# Altium PCB Power.PcbDoc
Units mil, origin at the board's own origin, x right, y up, seen from the top; angles counter-clockwise.
Board outline 6000 x 4000 mil, 2 copper layers (Top Layer, Bottom Layer); 17 components, 17 nets, 78 pads, 0 vias.
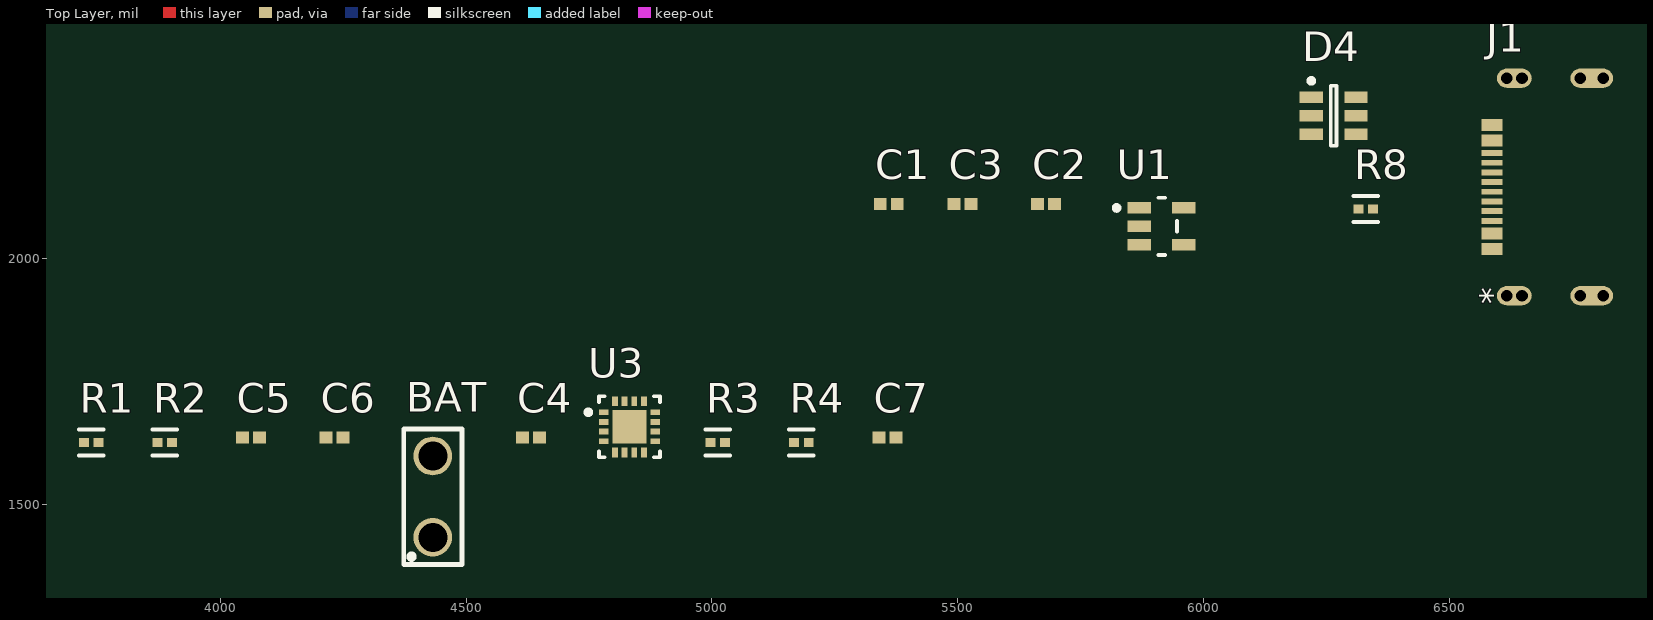
[diagram p0: Top Layer view]
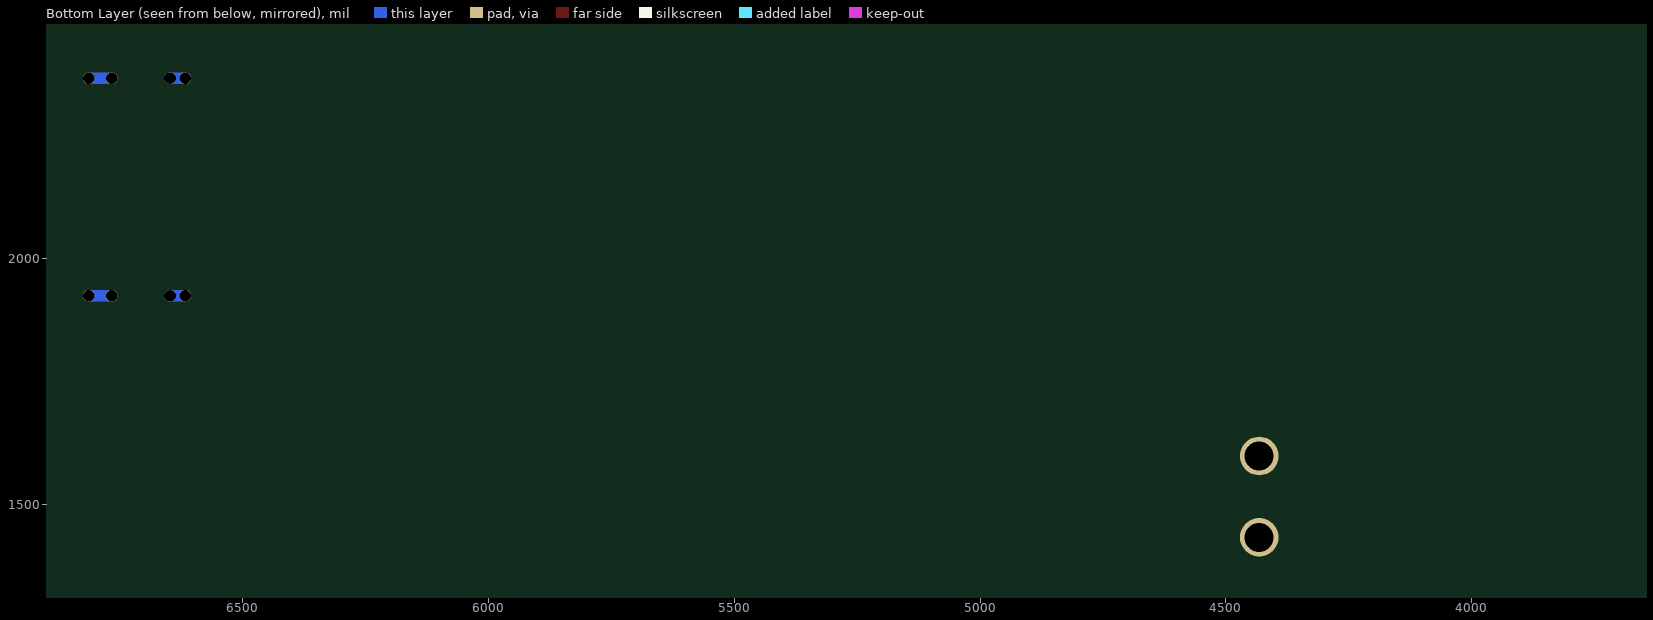
[diagram p1: Bottom Layer view, seen from below]

## Layer stack, top to bottom
Top Solder: solder mask 0.4, Solder Resist, Dk 3.5
Top Layer: signal copper 1.4
Dielectric 1: dielectric 12.6, FR-4, Dk 4.8
Bottom Layer: signal copper 1.4
Bottom Solder: solder mask 0.4, Solder Resist, Dk 3.5

## Board outline
1000,1000 7000,1000 7000,5000 1000,5000

## Design rules (kind name [scope] priority, off if disabled: settings)
Clearance [All] p1: gap=10 ignorepadtopadclearanceinfootprint=FALSE except(0: Arc-Hole Track-Hole SMDPad-Hole THPad-Hole Via-Hole Fill-Hole Poly-Hole Region-Hole Text-Hole)
PolygonConnect [All] p1: connectstyle=Relief reliefconductorwidth=10 reliefentries=4 polygonreliefangle="90 Angle" airgapwidth=10
RoomDefinition U_USB [InComponentClass('U_USB')] p1: confinementstyle=ConfineIn formatcopy=TRUE lockcomponents=FALSE outline 6135,1910 6825,1910 6825,2510 6135,2510
RoomDefinition U_L6924D013TR [InComponentClass('U_L6924D013TR')] p2: confinementstyle=ConfineIn formatcopy=TRUE lockcomponents=FALSE outline 3684.68,1355 5434.69,1355 5434.69,1755 3684.68,1755
RoomDefinition Power [InComponentClass('Power')] p3: confinementstyle=ConfineIn formatcopy=TRUE lockcomponents=FALSE outline 5975,995 7000,995 7000,1450 5975,1450
RoomDefinition U_LD3985M33R [InComponentClass('U_LD3985M33R')] p4: confinementstyle=ConfineIn formatcopy=TRUE lockcomponents=FALSE outline 5315,2000 6000,2000 6000,2250 5315,2250
RoutingVias [All] p1: holewidth=28 width=50 viastyle="Through Hole" minholewidth=28 minwidth=50 maxholewidth=28 maxwidth=50
SolderMaskExpansion [All] p1: expansion=4 istentingtop=FALSE
Width [All] p1: maxlimit=10 minlimit=10 preferedwidth=10
30 further rules are at their usual default settings.

## Classes and differential pairs
component class Power: C?

## Components (designator, comment, footprint, x,y, rotation, side; value= is the part's Value field where it differs from the comment)
BAT "Battery" Battery 4432.32,1515 r90 top
C1 "10 uF" CAPC1005X55X25NL05T10 5360,2110 r0 top
C2 "10 nF" CAPC1005X55X25NL05T10 5680,2110 r0 top
C3 "1 uF" CAPC1005X55X25NL05T10 5510,2110 r0 top
C4 "1 uF" CAPC1005X55X25NL05T10 4632.32,1635 r0 top
C5 "330 pF" CAPC1005X55X25NL05T10 4062.32,1635 r0 top
C6 "1 uF" CAPC1005X55X25NL05T10 4232.32,1635 r0 top
C7 "1 uF" CAPC1005X55X25NL05T10 5357.32,1635 r0 top
D4 "USBLC6-2SC6" STM-SOT23-6L_V 6265,2290 r0 top
J1 "USB4510-03-1-A" USB4510-03-1-A_GCT 6745,2145 r90 top
R1 "130 Kohm" FP-RC1005-IPC_C 3737.32,1625 r0 top
R2 "3.3 Kohm" FP-RC1005-IPC_C 3887.32,1625 r0 top
R3 "1 Kohm" FP-RC1005-IPC_C 5012.32,1625 r0 top
R4 "470 ohm" FP-RC1005-IPC_C 5182.32,1625 r0 top
R8 "5.3 Kohm" FP-RC1005-IPC_C 6330.1,2100 r0 top
U1 "LD3985M33R" FP-SOT23-5L-7049676-MFG 5915,2065 r0 top
U3 "L6924D013TR" FP-VFQFPN16-7185330-MFG 4832.48,1657.17 r0 top

## Footprints (in the part's own frame and the unit in brackets; to place one, negate y for a bottom-side part, rotate by r counter-clockwise, add the part's x,y. Pads: shape width x height; smd on the part's side, far side on the other; paste and mask are expansions set on the pad)
Battery [mm]
  round 2 hole 1.5: 1(-2.1,0) 2(2.1,0)
  silkscreen extent -3.5,-1.5 3.5,1.5
CAPC1005X55X25NL05T10 [mm] "Chip Capacitor, 2-Leads, Body 1.00x0.50mm, IPC Medium Density"
  rect 0.66x0.62 smd: 1(-0.44,0) 2(0.44,0)
  body extent -0.53,-0.28 0.53,0.27, height 0.55
FP-RC1005-IPC_C [mil]
  rect 20.29x18.6 smd paste+0 mask+0: 1(-14.9,0) 2(14.9,0)
  silkscreen extent -25,-27 25,27, body extent -29,-15 29,15, height 10
FP-SOT23-5L-7049676-MFG [mm]
  rect 1.2x0.6 smd paste+0 mask+0: 1(-1.15,0.95) 2(-1.15,0) 3(-1.15,-0.95) 4(1.15,-0.95) 5(1.15,0.95)
  silkscreen extent -2.45,-1.48 0.8,1.47, body extent -1.85,-1.58 1.85,1.57, height 0.25
FP-VFQFPN16-7185330-MFG [mm]
  rect 0.5x0.3 smd paste+0 mask+0: 1(-1.325,0.75) 2(-1.325,0.25) 3(-1.325,-0.25) 4(-1.325,-0.75) 9(1.325,-0.75) 10(1.325,-0.25) 11(1.325,0.25) 12(1.325,0.75)
  rect 0.3x0.5 smd paste+0 mask+0: 5(-0.75,-1.325) 6(-0.25,-1.325) 7(0.25,-1.325) 8(0.75,-1.325) 13(0.75,1.325) 14(0.25,1.325) 15(-0.25,1.325) 16(-0.75,1.325)
  rect 1.75x1.75 smd paste+0 mask+0: 17(0,0)
  silkscreen extent -2.25,-1.58 1.58,1.58, body extent -1.68,-1.68 1.68,1.68, height 0.25
STM-SOT23-6L_V [mm] "SOT23, 6-Leads, Body 3.05x1.75mm, Pitch 0.95mm"
  rect 1.2x0.6 smd: 1(-1.15,0.95) 2(-1.15,0) 3(-1.15,-0.95) 4(1.15,-0.95) 5(1.15,0) 6(1.15,0.95)
  silkscreen extent -1.27,-1.55 0.15,1.92, body extent -1.6,-1.53 1.6,1.53, height 1.45
USB4510-03-1-A_GCT [mil]
  oval 39x71 smd: 13(-221.25,112.25) 14(221.25,112.25)
  oval 39x87 smd: 15(-221.25,-45.2) 16(221.25,-45.2)
  rect 24x43 smd paste+0 mask+0: A1-B12(-126,157.5) A4-B9(-94.5,157.5) B1-A12(126,157.5) B4-A9(94.5,157.5)
  rect 12x43 smd paste+0 mask+0: A5(-49.2,157.5) A6(-9.8,157.5) A7(9.9,157.5) A8(49.3,157.5) B5(69,157.5) B6(29.6,157.5) B7(-29.5,157.5) B8(-69,157.5)
  round 24 hole 24 unplated: S_1_H1(-221.25,127.75) S_1_H2(-221.25,96.75) S_2_H1(221.25,127.75) S_2_H2(221.25,96.75) S_3_H1(-221.25,-21.7) S_3_H2(-221.25,-68.7) S_4_H1(221.25,-21.7) S_4_H2(221.25,-68.7)
  Multi-Layer lines w24: -221.25,127.75 -221.25,96.75 ; 221.25,127.75 221.25,96.75 ; -221.25,-21.7 -221.25,-68.7 ; 221.25,-21.7 221.25,-68.7
  body extent 0,0 10,10, height 10

## Part data
C1 C2 C3 C4 C5 C6 C7: library part CMP-2008-04515-1, Manufacturer=Murata, Part Number=GRM155F50J684ZE01D
D4: library part CMP-2000-05378-1, "Very low capacitance ESD protection, 3.5 pF, -40 to 125 degC, 6-Pin SOT23, RoHS, Tape and Reel", Capacitance Value=3.5pF, Clamping Voltage=17V, Leakage Current=0.15uA, Manufacturer=STMicroelectronics, Operating Temp Range=-40Cto125C, Operating Temperature Classification=Automotive, Operating Temperature Max Deg. C=125C, Operating Temperature Min Deg. C=-40C, Package / Case=SOT-23, Package Description="6-Pin Small Outline Transistor, Body 2.925 x 1.625 mm, Pitch 0.95 mm", Package Reference=SOT23-6L, Peak Pulse Current=5A, Reverse Breakdown Voltage=6V, Reverse Stand-off Voltage=5V, Test Current (It)=1mA, Clamping Voltage (Max)=17V, Configuration=Dual, Datasheet URL=http://www.st.com/st-web-ui/static/active/en/resource/technical/document/datasheet/CD00050750.pdf, Datasheet Version="Rev. 5, 10/2011", Direction Type=Uni-Directional, Leakage Current (Max)=0.15uA, Manufacturer URL=http://www.st.com/, Mounting=SurfaceMount, Mounting Style=SurfaceMount, Number of Elements=1, Packaging=TapeandReel, Pin Count=6, Polarity=Uni-Directional, Product Depth (mm)=1.75mm, Product Height (mm)=1.3mm, Product Length (mm)=3.05mm, Rad Hardened=No, Suppressor Type=DiodeArrays, Working Voltage=5V, Working Voltage (Max)=5V
J1: Mfr_Name="Global Connector Technology", Copyright="Copyright (C) 2023 Ultra Librarian. All rights reserved.", Manufacturer_Part_Number=USB4510-03-1-A, RefDes=RefDes, Type=Type
R1 R2 R3 R4 R8: library part CMP-13261-000953-1, "Res Thick Film 0402 1.87kΩ 1% 0.063W ±100ppm/°C Molded SMD T/R", Case Code (Imperial)=0402, Case Code (Metric)=1005, Max Operating Temperature=155°C, Max Power Dissipation=63mW, Min Operating Temperature=-55°C, Package Quantity=1, Resistance=1.87kR, Temperature Coefficient=100ppm/°C, Tolerance=1%, Voltage Rating (DC)=50V, Case/Package=0402, Composition="Thick Film", Contact Plating=Tin, Depth=0.5mm, Features="Moisture Resistant", Height=0.016inch, Lead Free="Lead Free", Length=1mm, Military Standard=Not, Number of Terminations=2, Packaging="Tape and Reel", Power Rating=63mW, Radiation Hardening=No, Width=0.02inch
U1: library part CMP-0244-00328-2, "IC REG LINEAR 3.3V 150MA SOT23-5", Case/Package=SOT-23, Dropout Voltage=60mV, Input Bias Current=85uA, Max Input Voltage=6V, Max Operating Temperature=125°C, Max Output Current=150mA, Min Current Limit=300mA, Min Input Voltage=2.5V, Min Operating Temperature=-40°C, Min Output Voltage=3.3V, Output Voltage Accuracy=2%, Package Quantity=1, Quiescent Current=150uA, Accuracy=2%, Height=1.3mm, Lead Free="Lead Free", Length=3mm, Mount="Surface Mount", Number of Outputs=1, Number of Pins=5, Number of Regulators=1, Output Current=150mA, Output Type=Fixed, Output Voltage=3.3V, Packaging="Tape and Reel", Polarity=Positive, Radiation Hardening=No, Width=1.75mm
U3: library part CMP-12147-000005-1, "IC BATT CHRGR ION/POLY 16-VFQFPN", Manufacturer=STMicroelectronics, Max Junction Temp=+125°C, Max Power Dissipation=0.67W, Max Supply Voltage=12V, Min Supply Voltage=2.5V, Nominal Supply Current=1.8mA, Output Current=975mA, Output Voltage=4.2V, Package=VFQFPN16-7185330, Temperature="-40°C to +125°C", Temperature Range Low=-40°C, Automotive=No, Category=IC, ComponentLink2Description=Datasheet, ComponentLink2URL=https://www.st.com/resource/en/datasheet/l6924d.pdf, Device Class L1="Integrated Circuits (ICs)", Device Class L2="Power Management ICs", Device Class L3="Battery Management", Digikey Description="IC BATT CHRGR ION/POLY 16-VFQFPN", Footprint Url=https://www.st.com/resource/en/datasheet/l6738.pdf, Height=1mm, Ipc Land Pattern Name=QFN50P300X300X90-16, Lead Free=Yes, Manufacturer Part Number=L6924D013TR, Mouser Description="Battery Management Battery Charger Sys Li-Ion/Li-Poly", Number Of Cells=1, Number of Outputs=1, Octopart=https://octopart.com/l6924d013tr-stmicroelectronics-421996, RoHS=TRUE, Standoff Height=0.02mm, Temperature Range High=+125°C

## Nets (pads, with @x,y where several pads share a name; then routed paths per layer and width w, separated by ;. In a path a pad name is that pad's centre, name@x,y a point inside that pad or via, vN(x,y) a via of type N, cw(c..) or ccw(c..) an arc to the next point about the centre after c; other vN are vias at no path point)
+3.3: 
GND: 
NetC1_1: 
NetC2_1: 
NetC2_2: 
NetC3_1: 
NetC4_1: 
NetC5_1: 
NetC6_1: 
NetC7_2: 
NetD4_4: 
NetD4_6: 
NetJ1_A5: 
NetR1_1: 
NetR3_2: 
VBAT: 
VUSB: 
pads on no net: BAT.1 BAT.2 C1.1 C1.2 C2.1 C2.2 C3.1 C3.2 C4.1 C4.2 C5.1 C5.2 C6.1 C6.2 C7.1 C7.2 D4.1 D4.2 D4.3 D4.4 D4.5 D4.6 J1.13 J1.14 J1.15 J1.16 J1.A1-B12 J1.A4-B9 J1.A5 J1.A6 J1.A7 J1.A8 J1.B1-A12 J1.B4-A9 J1.B5 J1.B6 J1.B7 J1.B8 J1.S_1_H1 J1.S_1_H2 J1.S_2_H1 J1.S_2_H2 J1.S_3_H1 J1.S_3_H2 J1.S_4_H1 J1.S_4_H2 R1.1 R1.2 R2.1 R2.2 R3.1 R3.2 R4.1 R4.2 R8.1 R8.2 U1.1 U1.2 U1.3 U1.4 U1.5 U3.1 U3.2 U3.3 U3.4 U3.5 U3.6 U3.7 U3.8 U3.9 U3.10 U3.11 U3.12 U3.13 U3.14 U3.15 U3.16 U3.17

## Text inside footprints (layer, text, board x,y; h text height)
J1: Top Overlay "*" at 6612.5,1906.5 h50 r90; Mechanical 13 "*" at 6612.5,1906.5 h50 r90